# Altium PCB PCB.PcbDoc
Units mm, origin at the board's own origin, x right, y up, seen from the top; angles counter-clockwise.
Board outline 80 x 68 mm, 2 copper layers (TOP, BOT), stack 1.636 mm thick; 72 components, 35 nets, 177 pads, 200 vias.
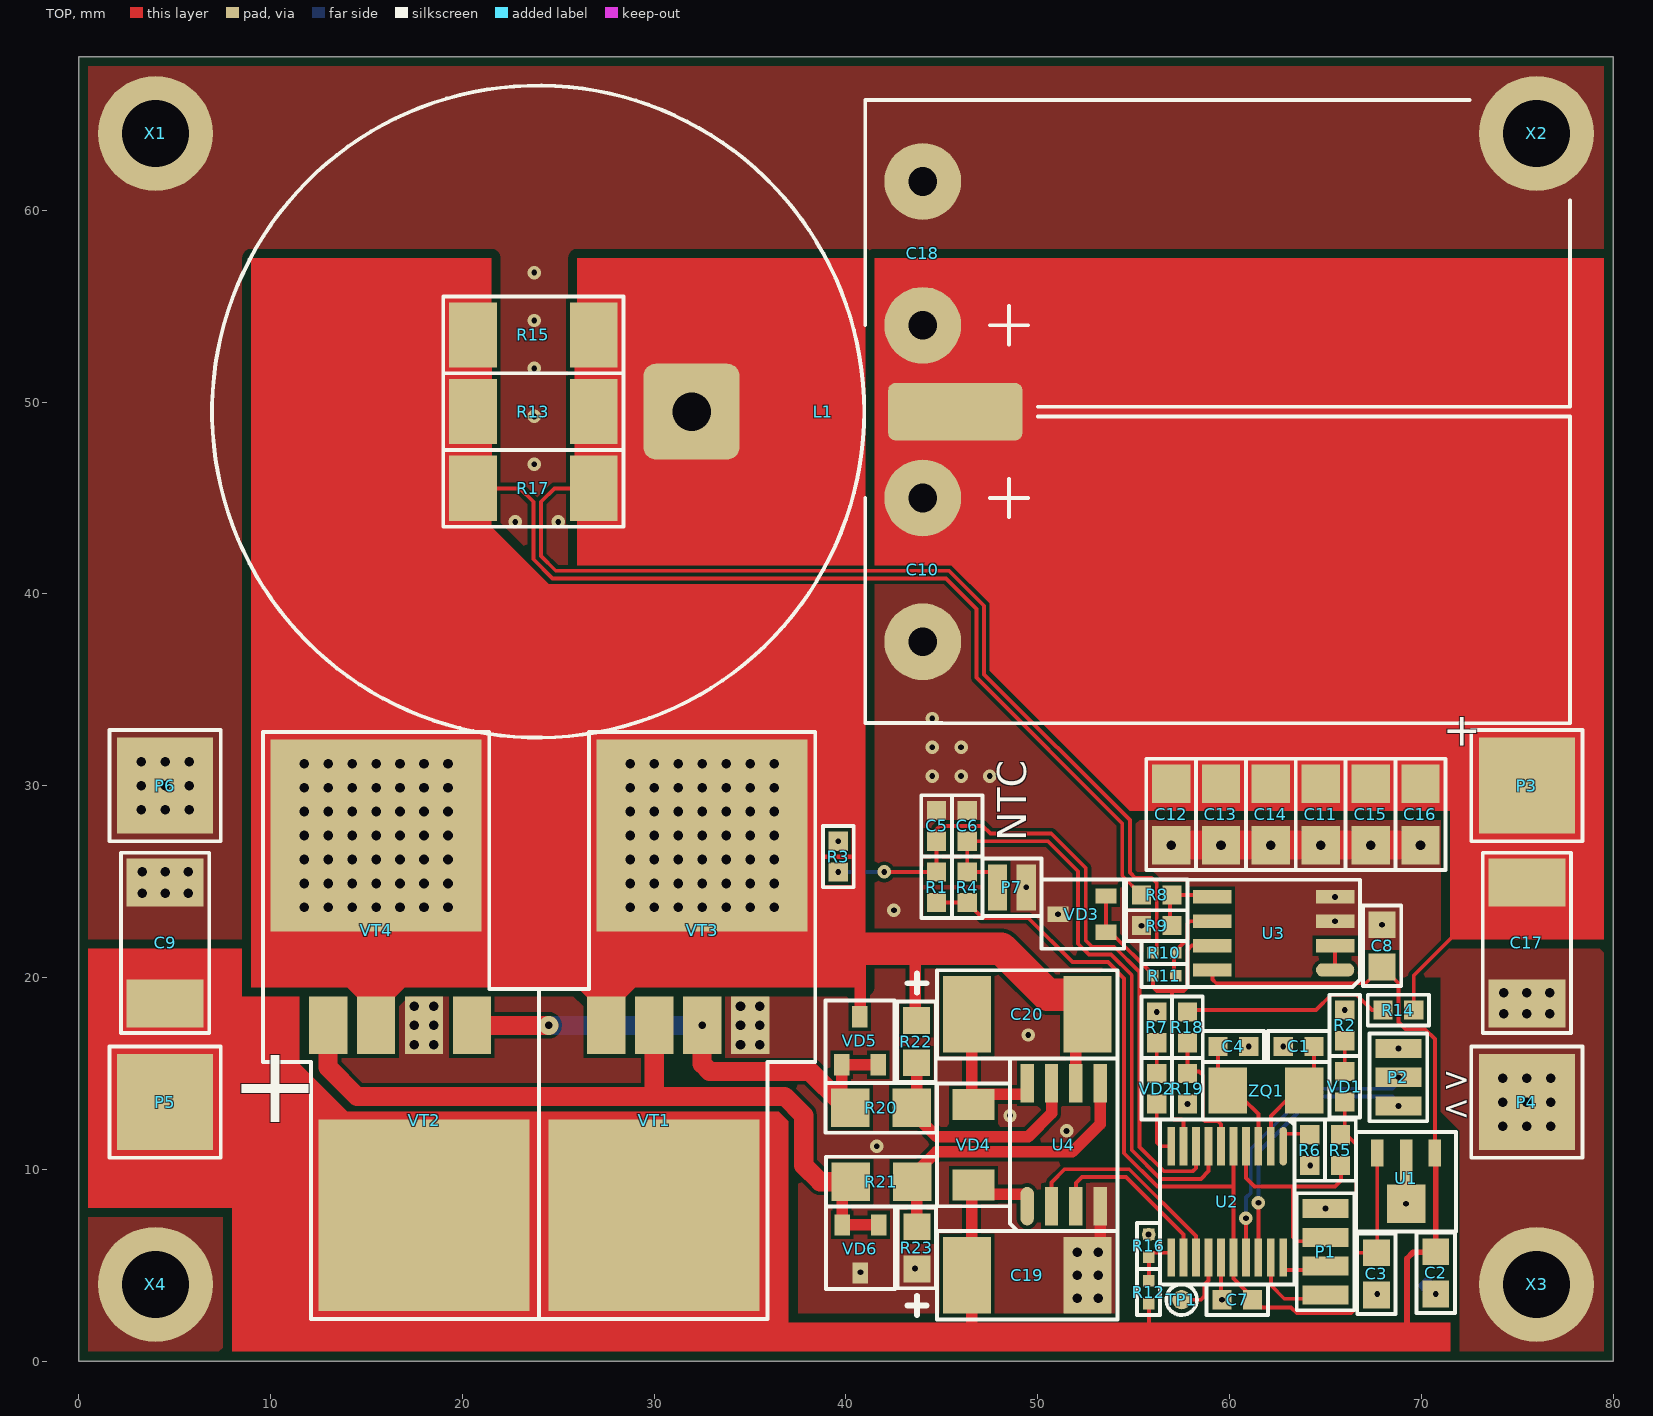
[diagram p0: TOP view]
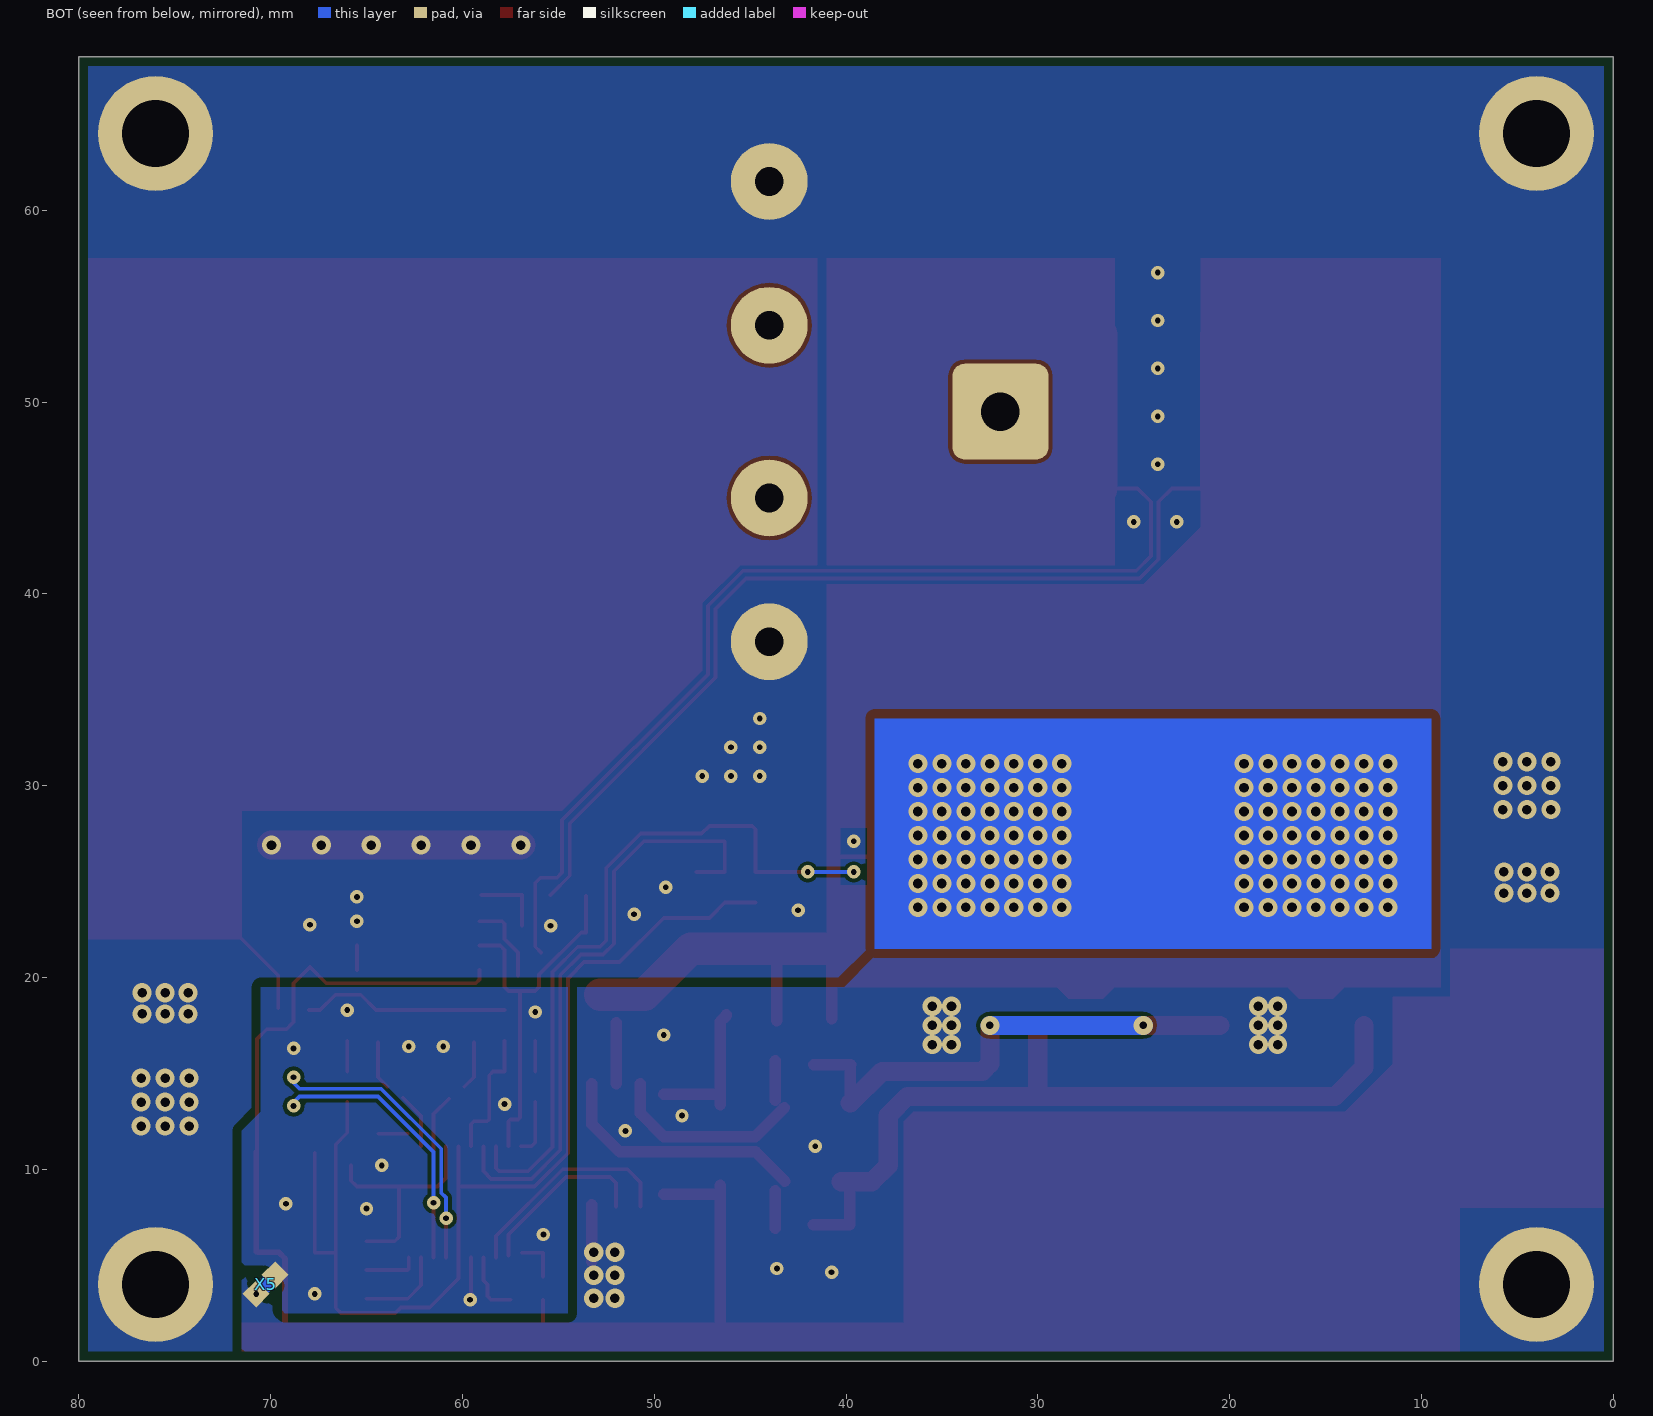
[diagram p1: BOT view, seen from below]
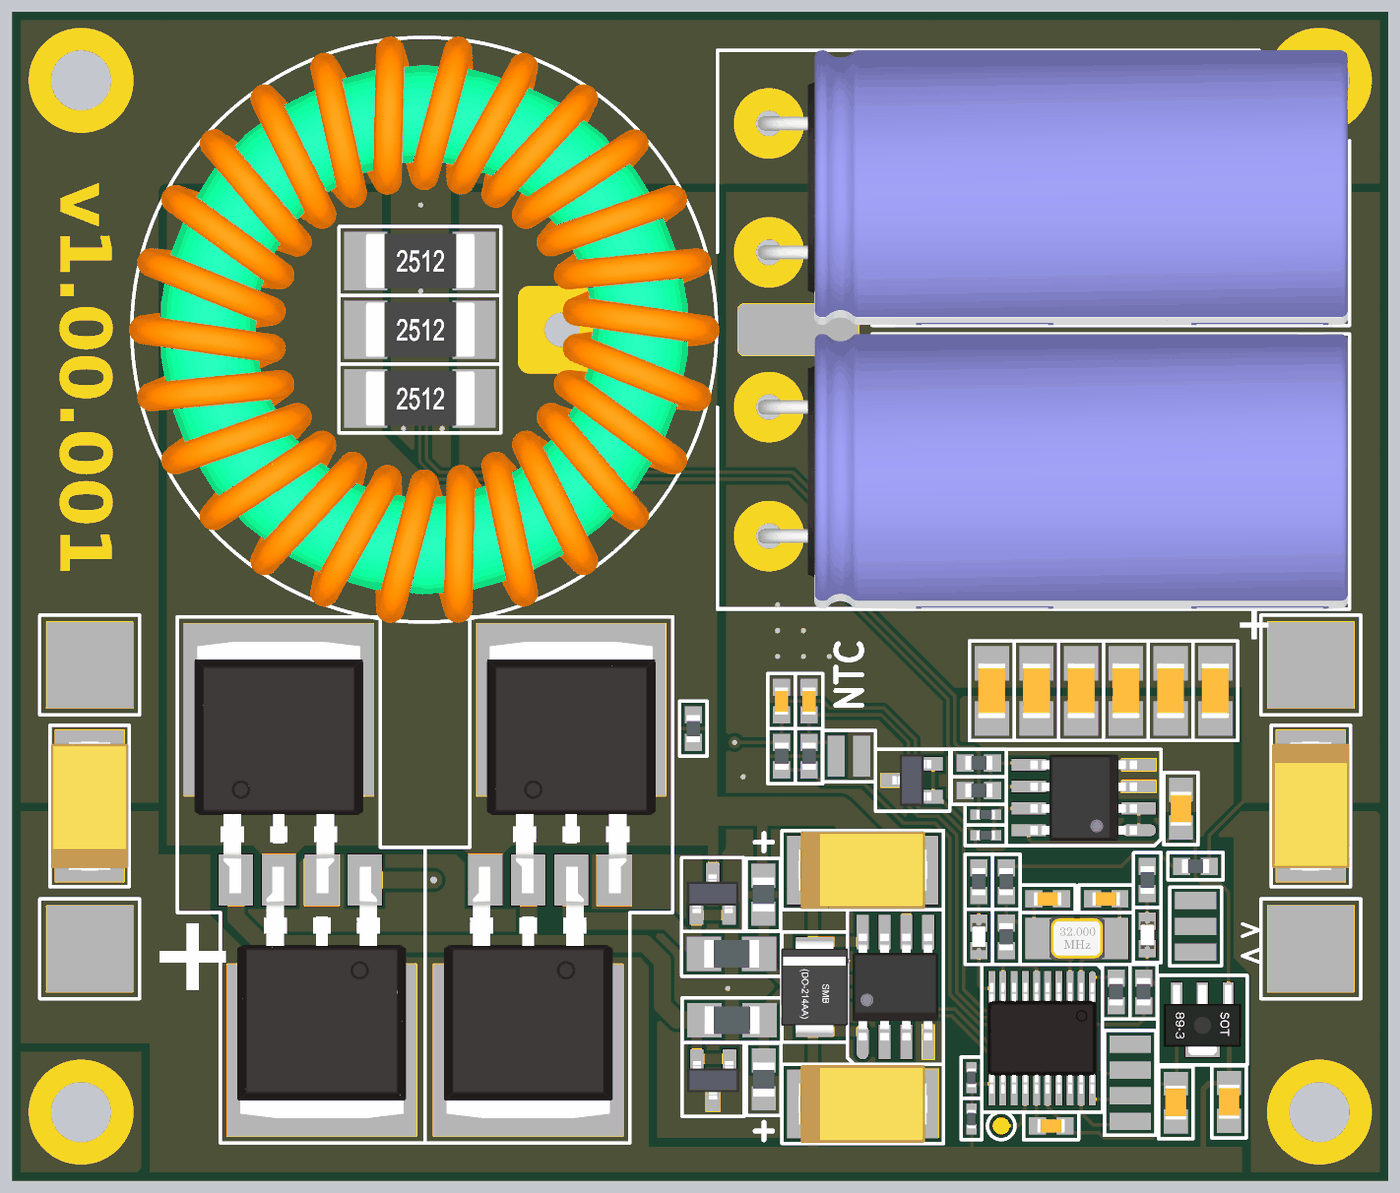
[diagram p2: 3D render of the assembled board from above, using the file's embedded part models]

## Layer stack, top to bottom
Top Solder: solder mask 0.0102, Solder Resist, Dk 3.5
TOP: signal copper 0.018
Dielectric 1: core 1.6, FR-4, Dk 4.2
BOT: signal copper 0.018
Bottom Solder: solder mask 0.0102, Solder Resist, Dk 3.5

## Board outline
0,0 80,0 80,68 0,68

## Design rules (kind name [scope] priority, off if disabled: settings)
AssemblyTestPointUsage [All] p1 off:
AssemblyTestpoint [All] p1 off: testpointundercomponent=TRUE minsize=1.016 maxsize=2.54 preferedsize=1.524 minholesize=0 maxholesize=1.016 preferedholesize=0.813 testpointgrid=0.025 usegrid=TRUE gridtolerance=0 allowsidetop=TRUE allowsidebottom=TRUE
BoardOutlineClearance [Not(OnTopSilkscreen Or OnBottomSilkscreen)] p1: gap=0.25 ignorepadtopadclearanceinfootprint=FALSE
Clearance Clearance_NPTH [IsPad And Not(PadIsPlated) And HasRoundHole] p1: gap=0.2 ignorepadtopadclearanceinfootprint=FALSE except(0.25: Arc-Hole Track-Hole SMDPad-Hole THPad-Hole Via-Hole Fill-Hole Poly-Hole Region-Hole Text-Hole) // Non-plated hole to copper
Clearance Clearance_PTH_INT [IsPad And PadIsPlated And HasRoundHole vs OnMid] p2: gap=0.2 ignorepadtopadclearanceinfootprint=FALSE except(0.35: Arc-Hole Track-Hole SMDPad-Hole THPad-Hole Via-Hole Fill-Hole Poly-Hole Region-Hole Text-Hole) // Plated hole without pad to copper
Clearance Clearance_PAD_VIA [IsPad And Not(OnMid) And OnOutside vs IsVia And OnOutside] p3: gap=0.2 ignorepadtopadclearanceinfootprint=FALSE // Minimum gap between SMD pad and via for valid solder mask bridge
Clearance [All] p4: gap=0.2 ignorepadtopadclearanceinfootprint=TRUE except(0.49: Fill-Poly Fill-Region Poly-Poly Poly-Region Region-Region) // Class 4 generic clearance
ComponentClearance ComponentClearanceTop [OnLayer('TOP') And Not(InComponentClass('NoCollision')) And Not(IsNetTieComponent) vs OnLayer('TOP') And Not(InComponentClass('NoCollision')) And Not(IsNetTieComponent)] p1: gap=0.15 collisioncheckmode=3 verticalgap=0.5 showdistances=TRUE
ComponentClearance ComponentClearanceBot [OnLayer('BOT') And Not(InComponentClass('NoCollision')) And Not(IsNetTieComponent) vs OnLayer('BOT') And Not(InComponentClass('NoCollision')) And Not(IsNetTieComponent)] p2: gap=0.15 collisioncheckmode=3 verticalgap=0.5 showdistances=TRUE
DiffPairsRouting [All] p1 off: maxlimit=0.254 minlimit=0.254 mostfreqgap=0.254 toplayer_minwidth=0.381 toplayer_maxwidth=0.381 toplayer_prefwidth=0.381 bottomlayer_minwidth=0.381 bottomlayer_maxwidth=0.381 bottomlayer_prefwidth=0.381 maxuncoupledlength=12.7
FabricationTestPointUsage [All] p1 off: valid=0 allowmultiple=FALSE
FabricationTestpoint [All] p1 off: side=3 testpointundercomponent=TRUE minsize=1.016 maxsize=2.54 preferedsize=1.524 minholesize=0 maxholesize=1.016 preferedholesize=0.813 testpointgrid=0.025 allowsidetop=TRUE allowsidebottom=TRUE usegrid=TRUE gridtolerance=0
FanoutControl Fanout_BGA [IsBGA] p1 off: bgadir=Out bgaviamode=Centered fanoutstyle=Auto fanoutdirection=Alternating viagrid=0.025 // Fanout_BGA (Default Rule)
FanoutControl Fanout_LCC [IsLCC] p2 off: bgadir=Out bgaviamode=Centered fanoutstyle=Auto fanoutdirection=Alternating viagrid=0.025 // Fanout_LCC (Default Rule)
FanoutControl Fanout_SOIC [IsSOIC] p3 off: bgadir=Out bgaviamode=Centered fanoutstyle=Auto fanoutdirection=Alternating viagrid=0.025 // Fanout_SOIC (Default Rule)
FanoutControl Fanout_Small [(CompPinCount < 5)] p4 off: bgadir=Out bgaviamode=Centered fanoutstyle=Auto fanoutdirection=OutThenIn viagrid=0.025 // Fanout_Small (Default Rule)
FanoutControl Fanout_Default [All] p5 off: bgadir=Out bgaviamode=Centered fanoutstyle=Auto fanoutdirection=Alternating viagrid=0.025 // Fanout_Default (Default Rule)
Height [All] p1 off: minheight=0 maxheight=35 prefheight=15
HoleSize HoleSize_PTH [IsVia or (IsPad And PadIsPlated)] p1: absolutevalues=TRUE maxlimit=6 minlimit=0.3 maxpercent=80.000 minpercent=20.000 // Plated holes
HoleSize HoleSize_NPTH [IsPad And Not(PadIsPlated)] p2: absolutevalues=TRUE maxlimit=6 minlimit=0.5 maxpercent=80.000 minpercent=20.000 // Non-plated holes
HoleToHoleClearance [All] p1 off: gap=0.4 allowstackedmicrovias=FALSE
LayerPairs [All] p1 off: enforce=TRUE
MinimumAnnularRing [All] p1: minimumring=0.2
MinimumSolderMaskSliver [Not(InComponent('DD101'))] p1: minsoldermaskwidth=0.15
NetAntennae [Not(InNet('5VIN') Or InNet('GND') Or  InNet('GNDBAT'))] p1: netantennaetolerance=0
PlaneClearance [All] p1 off: clearance=1
PlaneConnect [All] p1 off: planeconnectstyle=Relief reliefexpansion=0.5 reliefentries=4 reliefconductorwidth=0.5 reliefairgap=0.5
PolygonConnect PolygonConnect_Direct [IsPolygon vs InPadClass('HeatsinkPad') Or IsVia or InNet('PGND') or InNet('DGND')] p1: connectstyle=Direct reliefconductorwidth=1 reliefentries=4 polygonreliefangle="45 Angle" airgapwidth=0.5 // Direct connection between POLYCONN pads and shield polygons
PolygonConnect [All] p2: connectstyle=Direct reliefconductorwidth=0.4 reliefentries=4 polygonreliefangle="90 Angle" airgapwidth=0.2
RoutingCorners [All] p1 off: cornerstyle=Round minsetback=2 maxsetback=2
RoutingLayers [All] p1 off: top layer_v5=TRUE bottom layer_v5=TRUE
RoutingPriority [All] p1 off: routingpriority=0
RoutingTopology [All] p1 off: topology=Shortest
RoutingVias [All] p1: holewidth=0.3 width=0.6 viastyle="Through Hole" minholewidth=0.3 minwidth=0.5 maxholewidth=1.2 maxwidth=5
SilkToBoardRegionClearance [All] p1 off:
SilkToSilkClearance [All] p1 off: silktosilkclearance=0
SilkToSolderMaskClearance SilkscreenOverComponentPads [IsPad] p1: minsilkscreentomaskgap=0.15 clearancetoexposedcopper=TRUE
SolderMaskExpansion [All] p1: expansion=0.05
Width [All] p1: maxlimit=90 minlimit=0.2 preferedwidth=0.2 // Class 4
4 further rules are at their usual default settings.

## Components (designator, comment, footprint, x,y, rotation, side; value= is the part's Value field where it differs from the comment)
C1 "22p" C_0603/1608 63.6,16.4 r180 top
C2 "330n" C_0805/2012 70.75,4.6 r270 top
C3 "100n" C_0805/2012 67.65,4.55 r270 top
C4 "22p" C_0603/1608 60.2,16.4 r0 top
C5 "100n" C_0603/1608 44.725,27.9 r90 top
C6 "100n" C_0603/1608 46.325,27.9 r90 top
C7 "10u" C_0603/1608 60.4,3.2 r180 top
C8 "1u" C_0805/2012 67.95,21.65 r270 top
C9 "100u" TECAP_TYPE_D 4.5,21.8 r90 top
C10 "10000u" C_ELECTROLYTIC_6x35 44,41.25 r270 top
C11 "100u" C_1206/3216 64.75,28.5 r90 top
C12 "100u" C_1206/3216 56.95,28.5 r90 top
C13 "10u" C_1206/3216 59.55,28.5 r90 top
C14 "10u" C_1206/3216 62.15,28.5 r90 top
C15 "1u" C_1206/3216 67.35,28.5 r90 top
C16 "100n" C_1206/3216 69.95,28.5 r90 top
C17 "10n" TECAP_TYPE_D 75.5,21.8 r270 top
C18 "10000u" C_ELECTROLYTIC_6x35 44,57.75 r90 top
C19 "10u" TECAP_TYPE_D 49.45,4.475 r0 top
C20 "100u" TECAP_TYPE_D 49.45,18.075 r0 top
L1 "40A sat, 25u" "L_30x20x10 _SMD" 23.95,49.5 r270 top
P1 "Header 4" HDR_SMD_1X4_1.50 65,7.95 r270 top
P2 "Header 3" HDR_SMD_1X3_1.50 68.8,16.3 r270 top
P3 "Header 1" WIRE_SMD_5X5 75.5,30 r0 top
P4 "Header 1" WIRE_SMD_5X5 75.5,13.5 r0 top
P5 "Header 1" WIRE_SMD_5X5 4.5,13.5 r0 top
P6 "Header 1" WIRE_SMD_5X5 4.5,30 r0 top
P7 "Wired NTC" HDR_SMD_1X2_1.50 47.9,24.7 r0 top
R1 "?" R_0603/1608 44.725,24.7 r270 top
R2 "68R" R_0603/1608 66,17.5 r270 top
R3 "NCP18WB333K03RB" R_0603/1608 39.6,26.3 r270 top
R4 "?" R_0603/1608 46.325,24.7 r270 top
R5 "10k" R_0603/1608 65.775,11 r90 top
R6 "10k" R_0603/1608 64.175,11 r90 top
R7 "68R" R_0603/1608 56.2,17.4 r90 top
R8 "10k" R_0603/1608 56.2,24.3 r180 top
R9 "10k" R_0603/1608 56.2,22.7 r0 top
R10 "10k" R_0402/1005 56.6,21.3 r180 top
R11 "10k" R_0402/1005 56.6,20.1 r0 top
R12 "10k" R_0402/1005 55.775,3.6 r270 top
R13 "0.0?R" R_2512/6332 23.7,49.5 r180 top
R14 "0R" R_0603/1608 68.8,18.3 r0 top
R15 "0.0?R" R_2512/6332 23.7,53.5 r180 top
R16 "2k" R_0402/1005 55.775,6 r270 top
R17 "0.0?R" R_2512/6332 23.7,45.5 r180 top
R18 "10k" R_0603/1608 57.8,17.4 r90 top
R19 "2k" R_0603/1608 57.8,14.2 r90 top
R20 "2R7" R_1206/3216 41.825,13.2 r180 top
R21 "2R7" R_1206/3216 41.85,9.35 r180 top
R22 "100k" R_0805/2012 43.675,16.65 r90 top
R23 "100k" R_0805/2012 43.7,5.9 r270 top
TP1 "1kHz PWM" TP_SMD_D1.00 57.5,3.2 r0 top
U1 "L78L33ACUTR" SOT89 69.2,10.85 r180 top
U2 "STM32F030F" TSSOP20 59.875,8.3 r270 top
U3 "TL072CDR" SO8_1.27 62.3,22.295 r180 top
U4 "IRS21867SPBF" SO8_1.27 51.35,11.275 r90 top
VD1 "TO-3216BC-BF (G)" LED_0603/1608 66,14.3 r90 top
VD2 "TO-3216BC-BF (R)" LED_0603/1608 56.2,14.2 r90 top
VD3 "PESD3V3S2UT" SOT23-3 52.3,23.3 r180 top
VD4 "STPS3L60U" DO214AA/SMB 46.65,11.275 r90 top
VD5 "ESDA14V2L" SOT23-3 40.725,16.7 r90 top
VD6 "ESDA14V2L" SOT23-3 40.75,5.85 r270 top
VT1 "IRFS7440PBF (N)" TO263-2/D2PAK-2 30,9.9 r180 top
VT2 "IRFS7440PBF (N)" TO263-2/D2PAK-2 18,9.9 r180 top
VT3 "IRFS7440PBF (N)" TO263-2/D2PAK-2 32.5,25.1 r0 top
VT4 "IRFS7440PBF (N)" TO263-2/D2PAK-2 15.5,25.1 r0 top
X1 "Mounting hole" HOLE_M3_D6.0/3.5 4,64 r0 top
X2 "Mounting hole" HOLE_M3_D6.0/3.5 76,64 r0 top
X3 "Mounting hole" HOLE_M3_D6.0/3.5 76,4 r0 top
X4 "Mounting hole" HOLE_M3_D6.0/3.5 4,4 r0 top
X5 "" NET_TIE_0.8 70.255,3.995 r135 bottom net-tie
ZQ1 "NX5032GA-8MHz" "OSC_2PINS SMD" 61.9,14.1 r0 top

## Footprints (in the part's own frame and the unit in brackets; to place one, negate y for a bottom-side part, rotate by r counter-clockwise, add the part's x,y. Pads: shape width x height; smd on the part's side, far side on the other; paste and mask are expansions set on the pad)
C_0603/1608 [mm] "Capacitor, SMD, 0603 (1608 metric)"
  rect 1x1 smd mask+0: 1(-0.8,0) 2(0.8,0)
  silkscreen extent -1.6,-0.8 1.6,0.8, body extent -0.8,-0.4 0.8,0.4, height 0.7
C_0805/2012 [mm] "Capacitor, SMD, 0805 (2012 metric)"
  rect 1.4x1.4 smd mask+0: 1(-1.1,0) 2(1.1,0)
  silkscreen extent -2.1,-1 2.1,1, body extent -1,-0.62 1,0.63, height 1.25
C_1206/3216 [mm] "Capacitor, SMD, 1206 (3216 metric)"
  rect 2x2 smd mask+0: 1(-1.6,0) 2(1.6,0)
  silkscreen extent -2.9,-1.3 2.9,1.3, body extent -1.6,-0.8 1.6,0.8, height 1.45
C_ELECTROLYTIC_6x35 [mm] "Polar capacitor, D16x35 mm"
  round 4 hole 1.5: 1(-3.75,0) 2(3.75,0)
  silkscreen extent -8,-3 8,33.75, body extent -8,-0.65 8.01,33.66, height 16.1
DO214AA/SMB [mm] "SMB diode package"
  rect 1.62x2.18 smd: 1(2.1,0) 2(-2.1,0)
  silkscreen extent -3.2,-1.9 3.2,1.9, body extent -2.75,-1.95 2.75,1.95, height 2.45
HDR_SMD_1X2_1.50 [mm] "Pitch 1.50"
  rect 1x2.4 smd mask+0: 1(0,0) 2(1.5,0)
  silkscreen extent -0.8,-1.5 2.3,1.5
HDR_SMD_1X3_1.50 [mm] "Pitch 1.50"
  rect 1x2.4 smd mask+0: 1(0,0) 2(1.5,0) 3(3,0)
  silkscreen extent -0.77,-1.5 3.8,1.5
HDR_SMD_1X4_1.50 [mm] "Pitch 1.50"
  rect 1x2.4 smd mask+0: 1(0,0) 2(1.5,0) 3(3,0) 4(4.5,0)
  silkscreen extent -0.8,-1.5 5.3,1.5
HOLE_M3_D6.0/3.5 [mm] "Mounting hole, diameter 6.0mm, hole 3.5mm, for M3 screw"
  round 6 hole 3.5: 1(0,0)
"L_30x20x10 _SMD" [mm] "Inductor, radial"
  rrect25% 3x7 smd: 1(0,21.75)
  rrect25% 5x5 hole 2: 2(0,8)
  silkscreen extent -17,-17 17,17, body extent -17.05,-17.17 17.05,17.17, height 17.19
LED_0603/1608 [mm] "LED, SMD, 0603 (1608 metric)"
  rect 1x1 smd: A(-0.8,0) C(0.8,0)
  silkscreen extent -1.6,-0.8 1.6,0.8, body extent -0.8,-0.4 0.8,0.4, height 0.6
NET_TIE_0.8 [mm] "Net tie, 0.8mm width"
  rect 1x1 smd mask-1: 1(-0.7,0) 2(0.7,0)
  TOP region: -0.3,0.4 0.3,0.4 0.3,-0.4 -0.3,-0.4
  body extent -0.2,-0.4 0.2,0.4, height 0.1
"OSC_2PINS SMD" [mm] "Crystal oscillator, SMD, 2 pins"
  rect 2x2.4 smd: 1(-2,0) 2(2,0)
  silkscreen extent -3.3,-1.5 3.3,1.5, body extent -1.6,-1.26 1.6,1.26, height 1
R_0402/1005 [mm] "Resistor, SMD, 0402 (1005 metric)"
  rect 0.6x0.6 smd mask+0: 1(-0.6,0) 2(0.6,0)
  silkscreen extent -1.2,-0.6 1.2,0.6, body extent -0.55,-0.25 0.55,0.25, height 0.32
R_0603/1608 [mm] "Resistor, SMD, 0603 (1608 metric)"
  rect 1x1 smd mask+0: 1(-0.8,0) 2(0.8,0)
  silkscreen extent -1.6,-0.8 1.6,0.8, body extent -0.8,-0.4 0.8,0.4, height 0.45
R_0805/2012 [mm] "Resistor, SMD, 0805 (2012 metric)"
  rect 1.4x1.4 smd mask+0: 1(-1.1,0) 2(1.1,0)
  silkscreen extent -2.1,-1 2.1,1, body extent -1,-0.63 1,0.62, height 0.6
R_1206/3216 [mm] "Resistor, SMD, 1206 (3216 metric)"
  rect 2x2 smd mask+0: 1(-1.6,0) 2(1.6,0)
  silkscreen extent -2.9,-1.3 2.9,1.3, body extent -1.6,-0.8 1.6,0.8, height 0.6
R_2512/6332 [mm] "Resistor, SMD, 2512 (6332 metric)"
  rect 2.5x3.4 smd mask+0: 1(-3.15,0) 2(3.15,0)
  silkscreen extent -4.7,-2 4.7,2, body extent -3.2,-1.59 3.15,1.59, height 0.32
SO8_1.27 [mm]
  oval 2x0.7 smd: 1(-3.2,1.905)
  rect 2x0.7 smd: 2(-3.2,0.635) 3(-3.2,-0.635) 4(-3.2,-1.905) 5(3.2,-1.905) 6(3.2,-0.635) 7(3.2,0.635) 8(3.2,1.905)
  silkscreen extent -4.5,-2.8 4.5,2.8, body extent -3.1,-2.5 3.1,2.5, height 1.75
SOT23-3 [mm] "SOT23, 3 pins"
  rect 1.1x0.8 smd: 1(-1.25,0.95) 2(-1.25,-0.95) 3(1.25,0)
  silkscreen extent -2.2,-1.8 2.1,1.8, body extent -1.13,-1.5 1.13,1.5, height 1.22
SOT89 [mm] "SOT89"
  rect 0.65x1.4 smd: 1(-1.5,0) 3(1.5,0)
  rect 2x2 smd: 2(0,2.65)
  rect 0.65x3 smd: 2(0,0.8)
  silkscreen extent -2.6,-1.1 2.6,4.1, body extent -2.25,-0.55 2.25,3.55, height 1.5
TECAP_TYPE_D [mm] "Tantalum capacitor, Type D, SMD"
  rect 2.5x4 smd: 1(-3.15,0) 2(3.15,0)
  silkscreen extent -4.7,-2.3 4.7,2.3, body extent -3.75,-2.25 3.75,2.25, height 3.1
TO263-2/D2PAK-2 [mm] "TO263/D2PAK package"
  rect 2x3 smd: 1(-2.5,-7.6) 2(2.5,-7.6)
  rect 11x10 smd: 3(0,2.3)
  silkscreen extent -5.9,-9.5 6,7.7, body extent -4.91,-8.36 4.91,6.24, height 4.22
TP_SMD_D1.00 [mm] "SMD test point, 1.0 mm diameter"
  round 1 smd paste-10: 1(0,0)
  silkscreen extent -0.8,-0.8 0.8,0.8, body extent -0.5,-0.5 0.5,0.5, height 0.1
TSSOP20 [mm] "Dual row, 20 pins, 0.65mm pitch"
  oval 2x0.4 smd: 1(-2.9,2.925)
  rect 2x0.4 smd: 2(-2.9,2.275) 3(-2.9,1.625) 4(-2.9,0.975) 5(-2.9,0.325) 6(-2.9,-0.325) 7(-2.9,-0.975) 8(-2.9,-1.625) 9(-2.9,-2.275) 10(-2.9,-2.925) 11(2.9,-2.925) 12(2.9,-2.275) 13(2.9,-1.625) 14(2.9,-0.975) 15(2.9,-0.325) 16(2.9,0.325) 17(2.9,0.975) 18(2.9,1.625) 19(2.9,2.275) 20(2.9,2.925)
  silkscreen extent -4.3,-3.5 4.3,3.5, body extent -3.22,-3.2 3.22,3.2, height 1.11
WIRE_SMD_5X5 [mm]
  rect 5x5 smd: 1(0,0)
  silkscreen extent -2.9,-2.9 2.9,2.9

## Part data
C1 C2 C3 C4 C5 C6 C7 C8 C11 C12 C13 C14 C15 C16: library part Capacitor, "Non-polarized capacitor"
C9 C10 C17 C18 C19 C20: library part "Capacitor polar", "Polarized capacitor"
L1: library part Inductor, "Inductor"
P1: "Header, 4-Pin", LatestRevisionDate=17-Jul-2002, LatestRevisionNote="Re-released for DXP Platform.", Publisher="Altium Limited"
P2: "Header, 3-Pin", LatestRevisionDate=17-Jul-2002, LatestRevisionNote="Re-released for DXP Platform.", Publisher="Altium Limited"
P3 P4 P5 P6: "Header, 1-Pin", LatestRevisionDate=17-Jul-2002, LatestRevisionNote="Re-released for DXP Platform.", Publisher="Altium Limited"
P7: library part "Header 2", "Header, 2-Pin", LatestRevisionDate=17-Jul-2002, LatestRevisionNote="Re-released for DXP Platform.", Publisher="Altium Limited"
R1 R2 R4 R5 R6 R7 R8 R9 R10 R11 R12 R13 R14 R15 R16 R17 R18 R19 R20 R21 R22 R23: library part Resistor, "Resistor"
R3: library part Termistor, "Termistor"
TP1: library part "Test point", "Test point"
U1: library part L78L, "LDO voltage regulator"
U2: "32-bit Cortex-M0"
U3: library part "Op-amp dual", "Dual operation amplifier"
U4: "MOSFET driver"
VD1 VD2: library part LED, "LED"
VD3 VD5 VD6: library part "TVS x2 A-COM", "TVS x2"
VD4: library part Schottky, "Schottky diode"
VT1 VT2 VT3 VT4: library part "MOSFET N", "MOSFET N"
X1 X2 X3 X4: "Hole for screw M3, outline D6"
X5: library part "Net tie", "Net tie"
ZQ1: library part "Crystal oscillator", "Crystal oscillator"

## Via types
v1: diameter 1, hole 0.5, TOP to BOT, tented both sides, 152 vias
v2: diameter 0.7, hole 0.3, TOP to BOT, tented both sides, 46 vias
v3: diameter 1, hole 0.4, TOP to BOT, tented both sides, 2 vias

## Nets (pads, with @x,y where several pads share a name; then routed paths per layer and width w, separated by ;. In a path a pad name is that pad's centre, name@x,y a point inside that pad or via, vN(x,y) a via of type N, cw(c..) or ccw(c..) an arc to the next point about the centre after c; other vN are vias at no path point)
COMM_RX: P2.3 U2.18 | length 14.4
  TOP w0.2: U2.18 v2(61.5,8.25)
  BOT w0.2: v2(61.5,8.25) 61.5,10.9 64.4,13.8 68.5,13.8 v2@69,13.3
  other v2: 68.8,13.3
COMM_TX: P2.2 U2.17 | length 15.3
  TOP w0.2: U2.17 v2(60.85,7.45)
  BOT w0.2: v2(60.85,7.45) 60.85,8.519 61.1,8.769 61.1,11.066 64.234,14.2 68.5,14.2 69,14.7 v2@69,14.8
  other v2: 68.8,14.8
DC_DC_CURRENT: R11.1 U2.9 U3.7 VD3.1 VD3.2 | length 19.8
  TOP w0.2: VD3.2 VD3.1 53.8,22.35 56,20.15 R11.1 56,19.5 56.2,19.3 57,19.3 ; U2.9 57.6,12.5 57.5,12.6 57.1,12.6 57,12.7 57,16.076 57,19.3 ; U3.7 58.026,21.66 57.8,21.434 57.8,19.5 57.6,19.3 57,19.3
DC_DC_PWM: U2.12 U4.3 | length 9.3
  TOP w0.2: U4.3@51.985,8.05 U4.3 51.985,9.285 52.3,9.6 54.6,9.6 57.6,6.6 U2.12@57.6,5.5
DC_DC_PWM#: U2.13 U4.2 | length 11.6
  TOP w0.2: U4.2@50.715,8.05 U4.2 50.715,9.315 51.4,10 54.766,10 58.25,6.516 U2.13
DC_DC_VIN: R12.1 R16.2 U2.11 | length 2.3
  TOP w0.2: R12.1@55.8,4.4 R16.2@55.8,5.6 ; R16.2@55.8,5.65 U2.11@56.9,5.65
DC_DC_VOUT: R18.1 R19.2 U2.6 | length 7
  TOP w0.2: R18.1@57.8,16.7 57.8,15.1 58.4,15.1 58.6,14.9 58.6,12.6 58.7,12.5 59.4,12.5 59.55,12.35 U2.6
DGND: C1.2 C3.2 C4.2 C7.2 P1.1 P2.1 R2.1 R6.1 R7.2 R16.1 R19.1 U1.2 U2.15 X5.2 | length 2.2
  TOP w0.2: U2.15 59.55,3.25 v2(59.6,3.2)
  other v2: 67.7,3.5 55.775,6.6 65,7.95 69.2,8.2 64.2,10.2 57.8,13.4 68.8,16.3 61,16.4 62.8,16.4 56.2,18.2 66,18.3
DVDD_3V3: C3.1 C7.1 R1.2 R4.2 R5.2 U1.3 U2.5 U2.16 VD1.A | length 58.5
  TOP w0.2: R1.2 R4.2 47.125,23.1 49.5,23.1 51.8,20.8 53.653,20.8 54.5,19.953 54.5,10.831 56.231,9.1 60.2,9.1 ; U2.5 60.2,9.1 ; VD1.A 66,11.9 66.6,11.3 66.6,5.65 ; 66.6,5.75 66.6,5.65 ; U1.3 67.7,5.65 66.6,5.65 ; 60.2,9.1 U2.16 60.2,4.3 61.7,2.8 63.2,2.8 63.5,2.5 66.324,2.5 66.6,2.776 66.6,5.65
HS_GATE: R20.2 VD5.1 VD5.2 VT1.1 VT2.1 | length 26
  TOP w0.6: VD5.1@39.75,15.45 39.775,15.425 R20.2@39.775,13.45 ; VD5.1 VD5.2
  TOP w1: VT2.1 v3(24.5,17.5) ; v3(32.5,17.5) 32.5,15.5 32.9,15.1 38.125,15.1 R20.2@39.775,13.45
  BOT w1: v3(24.5,17.5) v3(32.5,17.5)
HS_GATE_DRV: R20.1 R22.1 U4.7 | length 12.2
  TOP w0.6: R20.1@43.225,13.2 44.725,11.7 49.5,11.7 50.715,12.915 U4.7@50.715,14.45 ; R20.1@43.7,13.6 R22.1@43.7,15.65
HS_SOURCE: C20.2 R8.2 R13.2 R15.2 R17.2 R22.2 U4.6 VD5.3 VT1.2 VT2.2 VT3.3 VT4.3 | length 80.6
  TOP w0.2: R17.2 23,45.5 23.7,44.8 23.7,41.8 24.7,40.8 45.21,40.8 46.8,39.21 46.8,35.634 54.4,28.034 54.4,25.3 R8.2
  TOP w0.4: 44.2,21.2 44.5,21.5
  TOP w0.6: VD5.3@40.75,17.85 40.75,21.4 ; R22.2@43.6,17.75 43.6,21.2 ; U4.6@51.985,14.45 U4.6 C20.2@51.985,17.65
  TOP w1.7: 40.9,21.5 44.5,21.5 48.1,21.5 50.5,19.1 C20.2@52.8,19.1
  TOP w2: R17.2 R13.2 R15.2
  other v1: 11.75,23.65 13,23.65 14.25,23.65 15.5,23.65 16.75,23.65 18,23.65 19.25,23.65 28.75,23.65 30,23.65 31.25,23.65 32.5,23.65 33.75,23.65 35,23.65 36.25,23.65 11.75,24.9 13,24.9 14.25,24.9 15.5,24.9 16.75,24.9 18,24.9 19.25,24.9 28.75,24.9 30,24.9 31.25,24.9 32.5,24.9 33.75,24.9 35,24.9 36.25,24.9 11.75,26.15 13,26.15 14.25,26.15 15.5,26.15 16.75,26.15 18,26.15 19.25,26.15 28.75,26.15 30,26.15 31.25,26.15 32.5,26.15 33.75,26.15 35,26.15 36.25,26.15 11.75,27.4 13,27.4 14.25,27.4 15.5,27.4 16.75,27.4 18,27.4 19.25,27.4 28.75,27.4 30,27.4 31.25,27.4 32.5,27.4 33.75,27.4 35,27.4 36.25,27.4 11.75,28.65 13,28.65 14.25,28.65 15.5,28.65 16.75,28.65 18,28.65 19.25,28.65 28.75,28.65 30,28.65 31.25,28.65 32.5,28.65 33.75,28.65 35,28.65 36.25,28.65 11.75,29.9 13,29.9 14.25,29.9 15.5,29.9 16.75,29.9 18,29.9 19.25,29.9 28.75,29.9 30,29.9 31.25,29.9 32.5,29.9 33.75,29.9 35,29.9 36.25,29.9 11.75,31.15 13,31.15 14.25,31.15 15.5,31.15 16.75,31.15 18,31.15 19.25,31.15 28.75,31.15 30,31.15 31.25,31.15 32.5,31.15 33.75,31.15 35,31.15 36.25,31.15
INDUCTOR_TEMP: C6.1 P7.1 R4.1 U2.7 | length 32
  TOP w0.2: P7.1@47.8,25.5 R4.1 C6.1 50.534,27.1 52.1,25.534 52.1,21.76 52.66,21.2 53.819,21.2 54.9,20.119 54.9,10.997 56.397,9.5 58.5,9.5 58.9,9.9 U2.7
LED_FAULT: U2.10 VD2.A | length 2.9
  TOP w0.2: VD2.A@56.2,13.5 56.2,11.4 56.4,11.2 U2.10
LS_GATE: R21.2 VD6.1 VD6.2 VT3.1 VT4.1 | length 40.7
  TOP w0.6: VD6.2 VD6.1 ; VD6.2@39.8,7.125 R21.2@39.8,8.8
  TOP w1: VT4.1 13,15.3 14.5,13.8 30,13.8 ; VT3.1 30,13.8 ; R21.2 38.65,9.35 37.8,10.2 37.8,12.8 36.8,13.8 30,13.8
LS_GATE_DRV: R21.1 R23.1 U4.5 | length 15.3
  TOP w0.6: R21.1@43.188,9.387 44.7,10.9 51.8,10.9 53.255,12.355 U4.5@53.255,14.45 ; R23.1@43.7,6.925 R23.1 R21.1@43.7,8.875
MCU_BOOT: R6.2 U2.1 | length 1.5
  TOP w0.2: U2.1@62.85,11.85 R6.2@64.375,11.85
MCU_RST#: P1.2 R5.1 U2.4 | length 12.1
  TOP w0.2: U2.4 60.85,9.55 61.3,9.1 63.3,9.1 ; P1.2@65,6.25 63.525,6.25 63.3,6.475 63.3,9.1 ; R5.1@65.8,10.2 65.8,9.4 65.5,9.1 63.3,9.1
MCU_SWCLK: P1.4 U2.19 | length 4.6
  TOP w0.2: U2.19 62.15,3.95 62.85,3.25 P1.4@65,3.25
MCU_SWDIO: P1.3 U2.20 | length 2.8
  TOP w0.2: U2.20 62.8,4.8 62.85,4.75 P1.3@65,4.75
MOSFET_TEMP: C5.1 R1.1 R3.2 U2.8 | length 37.2
  TOP w0.2: v2(42,25.5) R1.1 44.725,27.725 44.9,27.9 47.125,27.9 47.525,27.5 50.7,27.5 52.5,25.7 52.5,21.926 52.826,21.6 53.984,21.6 55.3,20.284 55.3,11.163 56.563,9.9 58.1,9.9 58.25,10.05 U2.8
  BOT w0.2: v2(39.6,25.5) v2(42,25.5)
NetC20_1: C20.1 U4.8 VD4.1 | length 7.7
  TOP w0.6: C20.1@46.25,18.05 46.25,18 46.55,17.7 VD4.1@46.55,13.9 ; VD4.1@46.55,13.375 VD4.1@46.55,13.9 ; U4.8@49.5,13.9 VD4.1@46.55,13.9
NetL1_1: L1.2 R10.2 R13.1 R15.1 R17.1 | length 60.5
  TOP w0.2: R17.1 24.8,45.5 24.1,44.8 24.1,41.966 24.866,41.2 45.376,41.2 47.2,39.376 47.2,35.8 54.8,28.2 54.8,25.466 55.066,25.2 55.924,25.2 56.2,24.924 56.2,21.6 R10.2@55.9,21.3
  TOP w2: R17.1 R13.1 R15.1
NetR2_2: R2.2 VD1.C | length 1.6
  TOP w0.2: VD1.C R2.2
NetR7_1: R7.1 VD2.C | length 1.6
  TOP w0.2: VD2.C@56.2,15.1 R7.1@56.2,16.7
NetR8_1: R8.1 R9.2 U3.5 | length 3.7
  TOP w0.2: R9.2@56.9,22.7 56.9,24.3 R8.1 U3.5@59,24.3
NetR10_1: R10.1 R11.2 U3.6 | length 4.3
  TOP w0.2: R11.2@57.1,20.1 57.1,21.3 57.8,22 57.8,22.8 57.93,22.93 U3.6
NetR14_1: R14.1 R18.2 | length 10.9
  TOP w0.2: R18.2@57.8,18.3 64.5,18.3 65.3,19.1 66.624,19.1 67.424,18.3 R14.1
NetTP1_1: TP1.1 U2.14 | length 3.4
  TOP w0.2: TP1.1 58.5,3.2 58.688,3.388 58.688,3.988 58.9,4.2 U2.14
NetU3_1: U3.1 U3.2 | length 1.3
  TOP w0.2: U3.1 U3.2
OSC_HSE_A: C1.1 U2.2 ZQ1.2 | length 5.4
  TOP w0.2: U2.2 62.15,12.775 ZQ1.2@63.1,13.725 ; ZQ1.2@63.9,14.3 64.4,14.8 C1.1 C1.1@64.4,16.6
OSC_HSE_B: C4.1 U2.3 ZQ1.1 | length 5.5
  TOP w0.2: C4.1@59.4,16.6 C4.1 59.4,14.8 ZQ1.1@59.9,14.3 ; ZQ1.1@60.7,13.675 61.5,12.875 U2.3 U2.3@61.5,11
PGND: C2.2 C5.2 C6.2 C8.1 C9.2 C10.2 C11.1 C12.1 C13.1 C14.1 C15.1 C16.1 C17.2 C18.2 C19.2 P4.1 P6.1 P7.2 R3.1 R9.1 R23.2 U3.3 U3.4 U4.4 VD3.3 VD6.3 VT3.2 VT4.2 X1.1 X2.1 X3.1 X4.1 X5.1 | length 16
  TOP w0.4: P4.1@75.45,13.55 v1(75.5,13.5)
  TOP w0.6: C19.2@53.255,5.18 U4.4@53.255,8.025 ; U4.4 U4.4@53.255,8.15
  TOP w1.5: v1(56.95,26.9) v1(59.55,26.9) v1(62.15,26.9) v1(64.75,26.9) v1(67.35,26.9) v1(69.95,26.9)
  other v1: 52.05,3.275 53.15,3.275 52.05,4.475 53.15,4.475 52.05,5.675 53.15,5.675 74.25,12.25 75.5,12.25 76.75,12.25 74.25,13.5 76.75,13.5 74.25,14.75 75.5,14.75 76.75,14.75 17.5,16.5 18.5,16.5 34.5,16.5 35.5,16.5 17.5,17.5 18.5,17.5 34.5,17.5 35.5,17.5 74.3,18.1 75.5,18.1 76.7,18.1 17.5,18.5 18.5,18.5 34.5,18.5 35.5,18.5 74.3,19.2 75.5,19.2 76.7,19.2 3.3,24.4 4.5,24.4 5.7,24.4 3.3,25.5 4.5,25.5 5.7,25.5 3.25,28.75 4.5,28.75 5.75,28.75 3.25,30 4.5,30 5.75,30 3.25,31.25 4.5,31.25 5.75,31.25
  other v2: 70.75,3.5 40.75,4.625 43.6,4.825 41.6,11.2 51.5,12 48.55,12.8 49.5,17 55.4,22.7 67.95,22.75 65.5,22.93 51.05,23.3 42.5,23.5 65.5,24.2 49.4,24.7 39.6,27.1 44.5,30.5 46,30.5 47.5,30.5 44.5,32 46,32 44.5,33.5 22.75,43.75 25,43.75 23.75,46.75 23.75,49.25 23.75,51.75 23.75,54.25 23.75,56.75
VIN_11V1: C2.1 C8.2 C9.1 C19.1 P5.1 R12.2 U1.1 U3.8 U4.1 VD4.2 VT1.3 VT2.3 | length 43.4
  TOP w0.2: 55.8,1.75 R12.2@55.8,3.2 ; U3.8 59.1,19.9 59.3,19.7 67.1,19.7 C8.2 68.8,19.7 68.8,17.75 68.8,17.676 69.176,17.3 70.2,17.3 70.7,16.8 70.7,11.3 U1.1
  TOP w0.3: 69.25,1.85 69.25,5.35 69.575,5.675 C2.1@70.675,5.675 ; C2.1 U1.1@70.75,10.9
  TOP w0.6: 46.55,1.6 VD4.2@46.55,8.7 ; VD4.2@46.55,9.175 VD4.2@46.55,8.7 ; U4.1@49.5,8.7 VD4.2@46.55,8.7
VOUT: C10.1 C11.2 C12.2 C13.2 C14.2 C15.2 C16.2 C17.1 C18.1 L1.1 P3.1 R14.2 | length 5.2
  TOP w0.2: R14.2@69.6,18.4 69.6,20.1 72.1,22.6

## Polygon pours and split planes (outlines as drawn)
PGND on BOT "BOT_PGND" (solid, remove dead copper, pour order 29): 0.5,0.5 79.5,0.5 79.5,67.5 0.5,67.5
DGND on BOT "BOT_DGND" (solid, remove dead copper, pour order 27): 70.5,19.5 70.5,13 71.5,12 71.5,5 70.4,5 69.4,4 69.4,2.5 54.5,2.5 54.5,9.5 54.5,19.5
PGND on TOP "TOP_PGND" (solid, remove dead copper, pour order 30): 54,9.5 54,20 71,20 71,19.5 71,13 72,12 72,0.5 79.5,0.5 79.5,19.5 79.5,67.5 0.5,67.5 0.5,0.5 54,0.5

## Other copper
TOP:
  region net VIN_11V1: 36.5,13 37,12.5 37,2 71.5,2 71.5,0.5 8,0.5 8,8 0.5,8 0.5,21.5 8.5,21.5 8.5,19 11.5,19 11.5,15.5 14,13
  region net NetL1_1: 26,57.5 41,57.5 41,41.5 26,41.5
  region net VOUT: 54.8,28.7 71.5,28.7 71.5,22 79.5,22 79.5,40.5 79.5,57.5 56.5,57.5 41.5,57.5 41.5,41.5 42.5,41.5 45.5,41.5 47.5,39.5 47.5,36
  region net HS_SOURCE: 40.3,24.8 40.3,25.4 41,25.4 41,19.5 29,19.5 28.4,18.9 26.6,18.9 26,19.5 17,19.5 16.4,18.9 14.6,18.9 14,19.5 9,19.5 9,57.5 21.5,57.5 21.5,43.5 24.5,40.5 41,40.5 41,27.8 38.9,27.8 38.9,26.4 40.3,26.4 40.3,27.8 41,27.8 41,25.4 40.3,25.4 40.3,26.2 38.9,26.2 38.9,24.8
BOT:
  region net HS_SOURCE: 9.5,21.5 38.5,21.5 38.5,33.5 9.5,33.5
  pour cut-out: 38.55,21.05 38.95,21.45 40.4,20 54.3,20 54.3,19.5 40.1,19.5
  pour cut-out: 71.5,5 72,5 72,0.5 71.5,0.5

## Silkscreen, mask and mechanical layers (free items; w line width, h text height)
Top Overlay:
  lines w0.2: 41,33.275 45,33.275 77.75,33.25 ; 47.5,45 49.5,45 ; 47.5,54 49.5,54 ; 48.5,44 48.5,46 ; 48.5,53 48.5,55 ; 50.55,49.25 77.75,49.25 ; 50.55,49.75 77.75,49.75
  lines w0.3: 43.2,2.9 44.2,2.9 ; 43.2,19.7 44.2,19.7 ; 43.7,2.4 43.7,3.4 ; 43.7,19.2 43.7,20.2
  text "+" at 71.1,31.5 h3
  text "NTC" at 49.4,27.1 h1.5 r90
  text ">" at 71.1,14.1 h1.25
  text "<" at 71.1,12.6 h1.25
  text "+" at 7.9,11.1 h7
Top Solder:
  text "v1.00.001" at 2.8,58.1 h4.65 r270
M4-BOARD:
  the board outline again, w0.2